# Altium PCB power_pcb.PcbDoc
Units mil, origin at the board's own origin, x right, y up, seen from the top; angles counter-clockwise.
Board outline 3107.48 x 2298.82 mil, 4 copper layers (Top Layer, Layer 1, Layer 2, Bottom Layer), stack 23.756 mil thick; 184 components, 90 nets, 482 pads, 12 vias.
Unrouted connection lines stored in the file: 242.
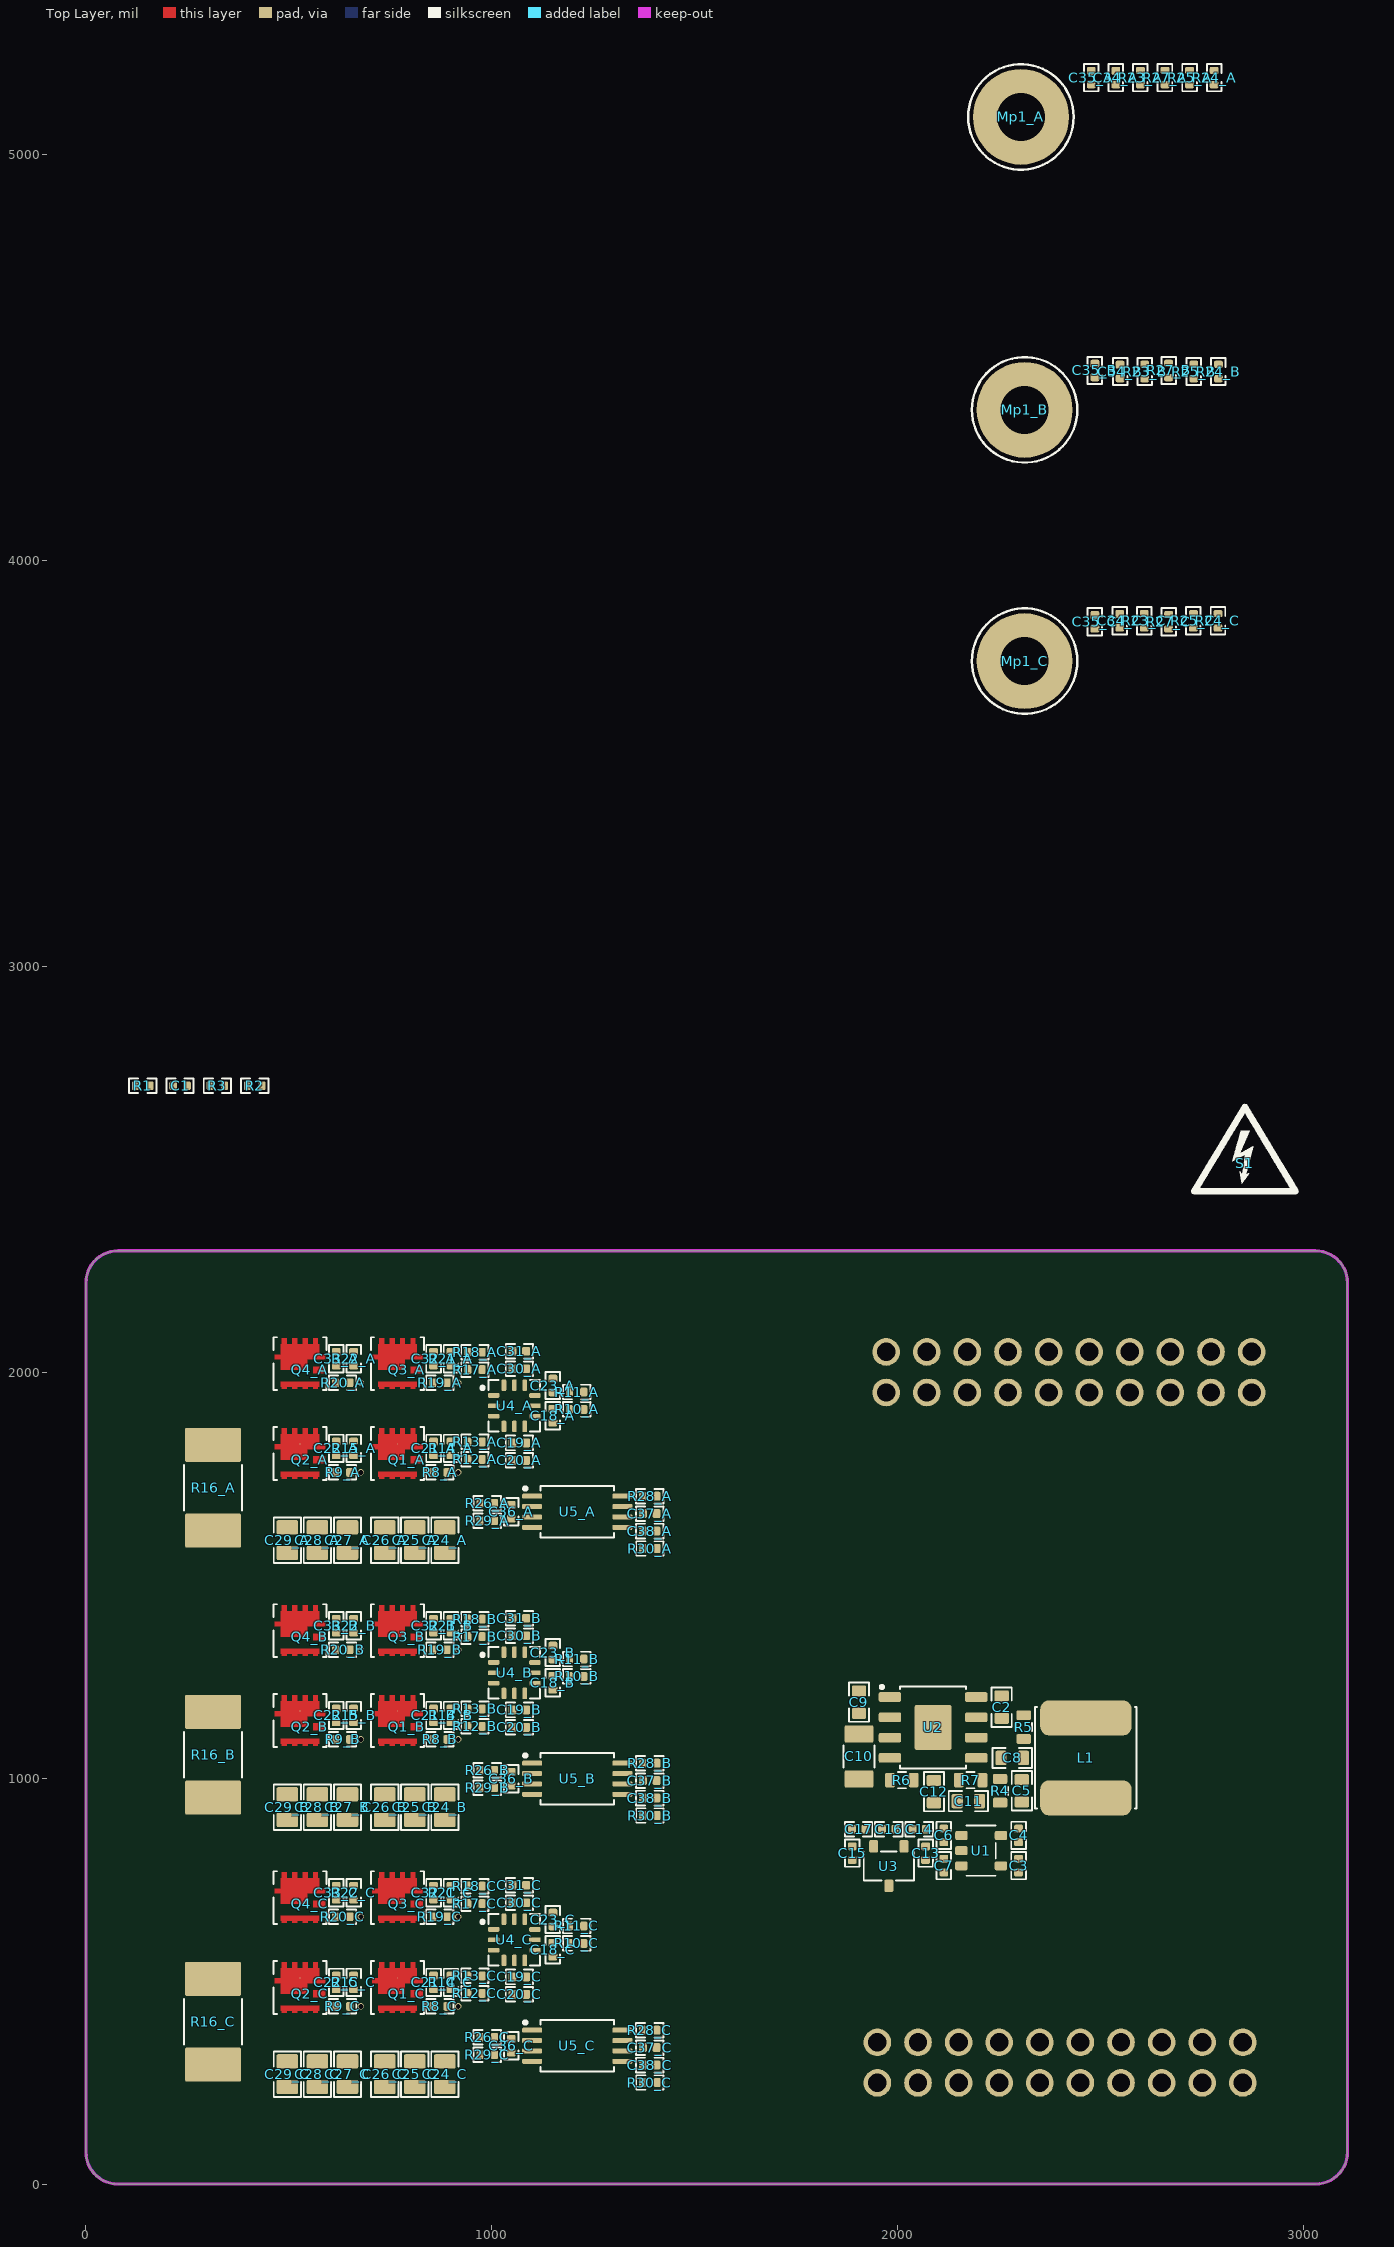
[diagram p0: Top Layer view]
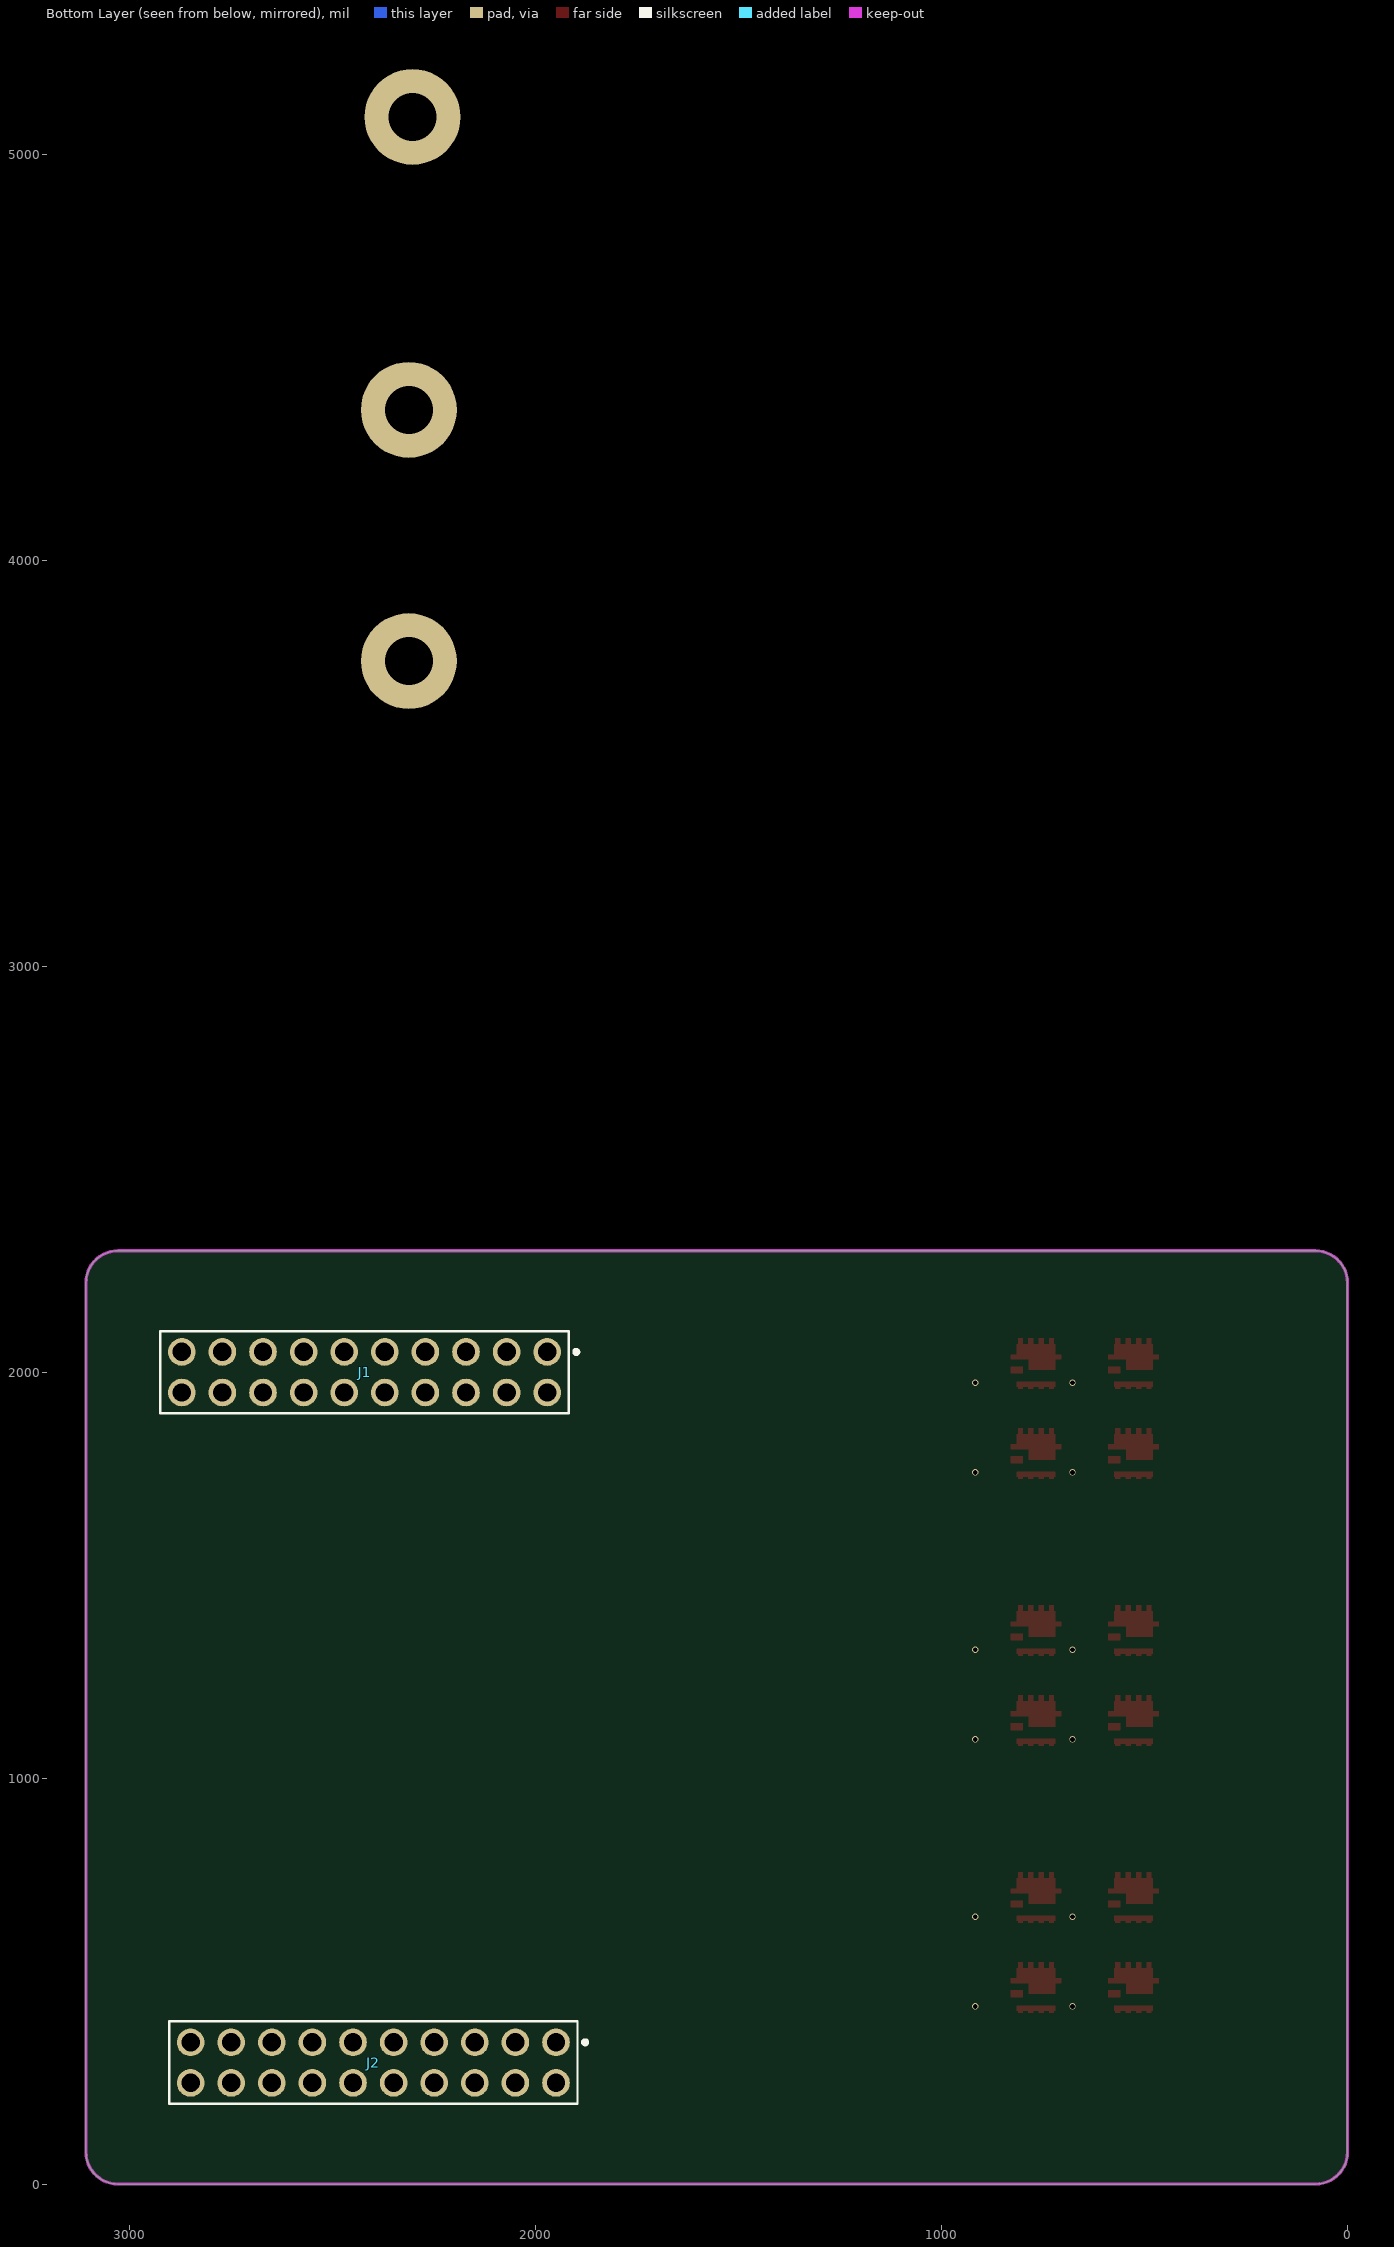
[diagram p1: Bottom Layer view, seen from below]

## Layer stack, top to bottom
Top Solder: solder mask 0.4, Solder Resist, Dk 3.5
Top Layer: signal copper 1.4
Dielectric 2: prepreg 2.8, PP-006, Dk 4.1
Layer 1: signal copper 1.378
Dielectric 1: dielectric 12.6, FR-4, Dk 4.8
Layer 2: signal copper 1.378
Dielectric 3: prepreg 2.8, PP-006, Dk 4.1
Bottom Layer: signal copper 1.4
Bottom Solder: solder mask 0.4, Solder Resist, Dk 3.5

## Board outline
0.25,78.99 0.25,2220.33 cw(c78.99,2220.33) 78.99,2299.07 3028.99,2299.07 cw(c3028.99,2220.33) 3107.73,2220.33 3107.73,78.99 cw(c3028.99,78.99) 3028.99,0.25 78.99,0.25 cw(c78.99,78.99)

## Design rules (kind name [scope] priority, off if disabled: settings)
Clearance [All] p1: gap=6 ignorepadtopadclearanceinfootprint=FALSE
DiffPairsRouting [All] p1: maxlimit=20 minlimit=6 mostfreqgap=10 toplayer_minwidth=6 toplayer_maxwidth=20 toplayer_prefwidth=10 midlayer1_minwidth=6 midlayer1_maxwidth=20 midlayer1_prefwidth=10 midlayer2_minwidth=6 midlayer2_maxwidth=20 midlayer2_prefwidth=10 bottomlayer_minwidth=6 bottomlayer_maxwidth=20 bottomlayer_prefwidth=10 maxuncoupledlength=500
HoleSize [All] p1: absolutevalues=TRUE maxlimit=248.03 minlimit=7.87 maxpercent=80.000 minpercent=20.000
PolygonConnect PolygonConnect_2 [All vs IsNamedPolygon('NONET_L-01_P-001') Or IsNamedPolygon('NONET_L-01_P-001') Or IsNamedPolygon('NONET_L-01_P-001') Or IsNamedPolygon('NONET_L-01_P-001') Or IsNamedPolygon('NONET_L-01_P-001') Or IsNamedPolygon('NONET_L-01_P-001') Or IsNamedPolygon('NONET_L-01_P-001') Or IsNamedPolygon('NONET_L-01_P-001') Or IsNamedPolygon('NONET_L-01_P-001')] p1: connectstyle=Direct reliefconductorwidth=10 reliefentries=4 polygonreliefangle="90 Angle" airgapwidth=10
PolygonConnect PolygonConnect_1 [All vs IsNamedPolygon('NONET_L-01_P-001') Or IsNamedPolygon('NONET_L-01_P-001') Or IsNamedPolygon('NONET_L-01_P-001') Or IsNamedPolygon('NONET_L-01_P-001') Or IsNamedPolygon('NONET_L-01_P-001') Or IsNamedPolygon('NONET_L-01_P-001')] p2: connectstyle=Direct reliefconductorwidth=10 reliefentries=4 polygonreliefangle="90 Angle" airgapwidth=10
PolygonConnect [All] p3: connectstyle=Direct reliefconductorwidth=10 reliefentries=4 polygonreliefangle="90 Angle" airgapwidth=10
RoomDefinition RoomDefinition_2 [InComponentClass('Room Definition5') vs False] p1: confinementstyle=ConfineIn formatcopy=TRUE lockcomponents=FALSE outline 1436.99,775.59 228.49,775.59 228.49,209.84 1436.99,209.84
RoomDefinition RoomDefinition_1 [InComponentClass('Room Definition4') vs False] p2: confinementstyle=ConfineIn formatcopy=TRUE lockcomponents=FALSE outline 1436.99,1433.26 228.49,1433.26 228.49,867.52 1436.99,867.52
RoomDefinition [InComponentClass('Room Definition1') vs False] p3: confinementstyle=ConfineIn formatcopy=TRUE lockcomponents=FALSE outline 1436.99,2090.94 228.49,2090.94 228.49,1525.19 1436.99,1525.19
RoutingVias [All] p1: holewidth=16 width=26 viastyle="Through Hole" minholewidth=12 minwidth=24 maxholewidth=24 maxwidth=40
SilkToSilkClearance [All] p1: silktosilkclearance=0
SolderMaskExpansion [All] p1: expansion=4 istentingtop=FALSE
SupplyNets "Schematic Supply Nets_4" [InNet('5V')] p1: voltage=0.000
SupplyNets "Schematic Supply Nets" [InNet('3V3')] p2: voltage=0.000
SupplyNets "Schematic Supply Nets_2" [InNet('GND')] p3: voltage=0.000
SupplyNets "Schematic Supply Nets_1" [InNet('POWER')] p4: voltage=0.000
UnRoutedNet [All] p1: checkbadconnections=TRUE
Width [All] p1: maxlimit=100 minlimit=5 preferedwidth=15
26 further rules are at their usual default settings.

## Classes and differential pairs
component class "Room Definition5": C18_C C19_C C20_C C21_C C22_C C23_C C24_C C25_C C26_C C27_C C28_C C29_C C30_C C31_C C32_C C33_C C36_C C37_C C38_C Q1_C Q2_C Q3_C Q4_C R8_C R9_C R10_C R11_C R12_C R13_C R14_C R15_C R16_C R17_C R18_C R19_C R20_C R21_C R22_C R26_C R28_C R29_C R30_C U4_C U5_C
component class "Room Definition4": C18_B C19_B C20_B C21_B C22_B C23_B C24_B C25_B C26_B C27_B C28_B C29_B C30_B C31_B C32_B C33_B C36_B C37_B C38_B Q1_B Q2_B Q3_B Q4_B R8_B R9_B R10_B R11_B R12_B R13_B R14_B R15_B R16_B R17_B R18_B R19_B R20_B R21_B R22_B R26_B R28_B R29_B R30_B U4_B U5_B
component class "Room Definition3": C18_C C19_C C20_C C21_C C22_C C23_C C24_C C25_C C26_C C27_C C28_C C29_C C30_C C31_C C32_C C33_C C34_C C36_C C37_C C38_C Q1_C Q2_C Q3_C Q4_C R8_C R9_C R10_C R11_C R12_C R13_C R14_C R15_C R16_C R17_C R18_C R19_C R20_C R21_C R22_C R23_C R24_C R25_C R26_C R28_C R29_C R30_C U4_C U5_C
component class "Room Definition2": C18_B C19_B C20_B C21_B C22_B C23_B C24_B C25_B C26_B C27_B C28_B C29_B C30_B C31_B C32_B C33_B C34_B C36_B C37_B C38_B Q1_B Q2_B Q3_B Q4_B R8_B R9_B R10_B R11_B R12_B R13_B R14_B R15_B R16_B R17_B R18_B R19_B R20_B R21_B R22_B R23_B R24_B R25_B R26_B R28_B R29_B R30_B U4_B U5_B
component class "Room Definition1": C18_A C19_A C20_A C21_A C22_A C23_A C24_A C25_A C26_A C27_A C28_A C29_A C30_A C31_A C32_A C33_A C36_A C37_A C38_A Q1_A Q2_A Q3_A Q4_A R8_A R9_A R10_A R11_A R12_A R13_A R14_A R15_A R16_A R17_A R18_A R19_A R20_A R21_A R22_A R26_A R28_A R29_A R30_A U4_A U5_A
component class Tree: C2 C3 C4 C5 C6 C7 C8 C9 C10 C11 C12 C13 C14 C15 C16 C17 L1 R4 R5 R6 R7 U1 U2 U3
channel class power_vsi: A B C
component class C: C18_C C19_C C20_C C21_C C22_C C23_C C24_C C25_C C26_C C27_C C28_C C29_C C30_C C31_C C32_C C33_C C34_C C35_C C36_C C37_C C38_C Mp1_C Q1_C Q2_C Q3_C Q4_C R8_C R9_C R10_C R11_C R12_C R13_C R14_C R15_C R16_C R17_C R18_C R19_C R20_C R21_C R22_C R23_C R24_C R25_C R26_C R27_C R28_C R29_C R30_C U4_C U5_C
component class B: C18_B C19_B C20_B C21_B C22_B C23_B C24_B C25_B C26_B C27_B C28_B C29_B C30_B C31_B C32_B C33_B C34_B C35_B C36_B C37_B C38_B Mp1_B Q1_B Q2_B Q3_B Q4_B R8_B R9_B R10_B R11_B R12_B R13_B R14_B R15_B R16_B R17_B R18_B R19_B R20_B R21_B R22_B R23_B R24_B R25_B R26_B R27_B R28_B R29_B R30_B U4_B U5_B
component class A: C18_A C19_A C20_A C21_A C22_A C23_A C24_A C25_A C26_A C27_A C28_A C29_A C30_A C31_A C32_A C33_A C34_A C35_A C36_A C37_A C38_A Mp1_A Q1_A Q2_A Q3_A Q4_A R8_A R9_A R10_A R11_A R12_A R13_A R14_A R15_A R16_A R17_A R18_A R19_A R20_A R21_A R22_A R23_A R24_A R25_A R26_A R27_A R28_A R29_A R30_A U4_A U5_A
component class power_full: C1 J1 J2 R1 R2 R3 S1
differential pair I_C: +I_C_P -I_C_N
differential pair I_B: +I_B_P -I_B_N
differential pair I_A: +I_A_P -I_A_N

## Components (designator, comment, footprint, x,y, rotation, side; value= is the part's Value field where it differs from the comment)
C1 "68nF" C0402 232.07,2705.72 r0 top
C2 "2.2nF" C0603 2256,1175 r90 top
C3 "1uF" C0402 2297.5,784.73 r90 top
C4 "100nF" C0402 2297.5,859 r270 top
C5 "1.2nF" C0603 2305.5,969.06 r90 top
C6 "100nF" C0402 2113.5,859 r270 top
C7 "1uF" C0402 2113.5,784.73 r90 top
C8 "56pF" C0603 2281.88,1050 r0 top
C9 "100nF" C0603 1904.5,1187.5 r270 top
C10 "2.2uF" C1206 1904.5,1053.5 r90 top
C11 "2.2uF" C0603 2174,943.5 r0 top
C12 "100nF" C0603 2089,967 r270 top
C13 "100nF" C0402 2068.5,815.5 r90 top
C14 "1uF" C0402 2053,874.5 r0 top
C15 "10uF" C0402 1887.75,815.5 r90 top
C16 "10uF" C0402 1978,874.5 r180 top
C17 "100nF" C0402 1903.5,874.5 r0 top
C18_A "100pF" C0402 1150.49,1892.8 r270 top (schematic designator C18)
C18_B "100pF" C0402 1150.49,1235.13 r270 top (schematic designator C18)
C18_C "100pF" C0402 1150.49,577.45 r270 top (schematic designator C18)
C19_A "100nF" C0402 1067.99,1825.8 r0 top (schematic designator C19)
C19_B "100nF" C0402 1067.99,1168.13 r0 top (schematic designator C19)
C19_C "100nF" C0402 1067.99,510.45 r0 top (schematic designator C19)
C20_A "100nF" C0402 1067.99,1782.8 r0 top (schematic designator C20)
C20_B "100nF" C0402 1067.99,1125.13 r0 top (schematic designator C20)
C20_C "100nF" C0402 1067.99,467.45 r0 top (schematic designator C20)
C21_A "100pF" C0402 856.49,1812.3 r270 top (schematic designator C21)
C21_B "100pF" C0402 856.49,1154.63 r270 top (schematic designator C21)
C21_C "100pF" C0402 856.49,496.95 r270 top (schematic designator C21)
C22_A "100pF" C0402 616.66,1812.3 r270 top (schematic designator C22)
C22_B "100pF" C0402 616.66,1154.63 r270 top (schematic designator C22)
C22_C "100pF" C0402 616.66,496.95 r270 top (schematic designator C22)
C23_A "100pF" C0402 1150.49,1967.3 r270 top (schematic designator C23)
C23_B "100pF" C0402 1150.49,1309.63 r270 top (schematic designator C23)
C23_C "100pF" C0402 1150.49,651.95 r270 top (schematic designator C23)
C24_A "100nF" C0805 884.49,1586.3 r90 top (schematic designator C24)
C24_B "100nF" C0805 884.49,928.63 r90 top (schematic designator C24)
C24_C "100nF" C0805 884.49,270.95 r90 top (schematic designator C24)
C25_A "1uF" C0805 810.49,1586.3 r90 top (schematic designator C25)
C25_B "1uF" C0805 810.49,928.63 r90 top (schematic designator C25)
C25_C "1uF" C0805 810.49,270.95 r90 top (schematic designator C25)
C26_A "2.2uF" C0805 736.49,1586.3 r90 top (schematic designator C26)
C26_B "2.2uF" C0805 736.49,928.63 r90 top (schematic designator C26)
C26_C "2.2uF" C0805 736.49,270.95 r90 top (schematic designator C26)
C27_A "100nF" C0805 644.49,1586.3 r90 top (schematic designator C27)
C27_B "100nF" C0805 644.49,928.63 r90 top (schematic designator C27)
C27_C "100nF" C0805 644.49,270.95 r90 top (schematic designator C27)
C28_A "1uF" C0805 570.49,1586.3 r90 top (schematic designator C28)
C28_B "1uF" C0805 570.49,928.63 r90 top (schematic designator C28)
C28_C "1uF" C0805 570.49,270.95 r90 top (schematic designator C28)
C29_A "2.2uF" C0805 496.49,1586.3 r90 top (schematic designator C29)
C29_B "2.2uF" C0805 496.49,928.63 r90 top (schematic designator C29)
C29_C "2.2uF" C0805 496.49,270.95 r90 top (schematic designator C29)
C30_A "4.7uF" C0402 1067.99,2008.8 r0 top (schematic designator C30)
C30_B "4.7uF" C0402 1067.99,1351.13 r0 top (schematic designator C30)
C30_C "4.7uF" C0402 1067.99,693.45 r0 top (schematic designator C30)
C31_A "100nF" C0402 1067.99,2051.8 r180 top (schematic designator C31)
C31_B "100nF" C0402 1067.99,1394.13 r180 top (schematic designator C31)
C31_C "100nF" C0402 1067.99,736.45 r180 top (schematic designator C31)
C32_A "100pF" C0402 856.49,2033.3 r270 top (schematic designator C32)
C32_B "100pF" C0402 856.49,1375.63 r270 top (schematic designator C32)
C32_C "100pF" C0402 856.49,717.95 r270 top (schematic designator C32)
C33_A "100pF" C0402 616.66,2033.3 r270 top (schematic designator C33)
C33_B "100pF" C0402 616.66,1375.63 r270 top (schematic designator C33)
C33_C "100pF" C0402 616.66,717.95 r270 top (schematic designator C33)
C34_A "68nF" C0402 2537.07,5188.98 r90 top (schematic designator C34)
C34_B "68nF" C0402 2547.57,4464.98 r90 top (schematic designator C34)
C34_C "68nF" C0402 2546.57,3850.9 r90 top (schematic designator C34)
C35_A "2.2nF" C0402 2476.52,5188.98 r90 top (schematic designator C35)
C35_B "2.2nF" C0402 2485.52,4467.48 r90 top (schematic designator C35)
C35_C "2.2nF" C0402 2485.52,3848.48 r90 top (schematic designator C35)
C36_A "1nF" C0402 1047.99,1656.3 r270 top (schematic designator C36)
C36_B "1nF" C0402 1047.99,998.63 r270 top (schematic designator C36)
C36_C "1nF" C0402 1047.99,340.95 r270 top (schematic designator C36)
C37_A "100nF" C0402 1388.99,1651.8 r180 top (schematic designator C37)
C37_B "100nF" C0402 1388.99,994.13 r180 top (schematic designator C37)
C37_C "100nF" C0402 1388.99,336.45 r180 top (schematic designator C37)
C38_A "100nF" C0402 1388.99,1608.8 r180 top (schematic designator C38)
C38_B "100nF" C0402 1388.99,951.13 r180 top (schematic designator C38)
C38_C "100nF" C0402 1388.99,293.45 r180 top (schematic designator C38)
J1 "SSQ-110-03-G-D" HDR-TH_P2.5_20P-Stacking 2421.5,2000 r0 bottom locked
J2 "SSQ-110-03-G-D" HDR-TH_P2.5_20P-Stacking 2399.83,299.5 r0 bottom locked
L1 "33uH" IND-SMD6028 2463.5,1050 r270 top
Mp1_A "UVW" M2.5-S 2303.37,5092.13 r90 top (schematic designator Mp1)
Mp1_B "UVW" M2.5-S 2312.37,4370.63 r90 top (schematic designator Mp1)
Mp1_C "UVW" M2.5-S 2312.37,3751.63 r90 top (schematic designator Mp1)
Q1_A "INN100EA035A" En-FCLGA9 767.49,1799.94 r180 top (schematic designator Q1)
Q1_B "INN100EA035A" En-FCLGA9 767.49,1142.27 r180 top (schematic designator Q1)
Q1_C "INN100EA035A" En-FCLGA9 767.49,484.59 r180 top (schematic designator Q1)
Q2_A "INN100EA035A" En-FCLGA9 527.49,1799.94 r180 top (schematic designator Q2)
Q2_B "INN100EA035A" En-FCLGA9 527.49,1142.27 r180 top (schematic designator Q2)
Q2_C "INN100EA035A" En-FCLGA9 527.49,484.59 r180 top (schematic designator Q2)
Q3_A "INN100EA035A" En-FCLGA9 767.49,2021.3 r180 top (schematic designator Q3)
Q3_B "INN100EA035A" En-FCLGA9 767.49,1363.63 r180 top (schematic designator Q3)
Q3_C "INN100EA035A" En-FCLGA9 767.49,705.95 r180 top (schematic designator Q3)
Q4_A "INN100EA035A" En-FCLGA9 527.49,2021.3 r180 top (schematic designator Q4)
Q4_B "INN100EA035A" En-FCLGA9 527.49,1363.63 r180 top (schematic designator Q4)
Q4_C "INN100EA035A" En-FCLGA9 527.49,705.95 r180 top (schematic designator Q4)
R1 "30K" R0402 140.02,2705.72 r0 top
R2 "27K" R0402 416.17,2705.72 r0 top
R3 "2.2K" R0402 324.12,2705.72 r0 top
R4 "316K" R0603 2252,969 r270 top
R5 "58.3K" R0603 2310.22,1126 r90 top
R6 "21K" R0603 2010,995.25 r180 top
R7 "101K" R0603 2179.48,995.25 r0 top
R8_A "1R" R0402 872.24,1753.3 r0 top (schematic designator R8)
R8_B "1R" R0402 872.24,1095.63 r0 top (schematic designator R8)
R8_C "1R" R0402 872.24,437.95 r0 top (schematic designator R8)
R9_A "1R" R0402 632.49,1753.3 r0 top (schematic designator R9)
R9_B "1R" R0402 632.49,1095.63 r0 top (schematic designator R9)
R9_C "1R" R0402 632.49,437.95 r0 top (schematic designator R9)
R10_A "22R" R0402 1208.99,1908.3 r180 top (schematic designator R10)
R10_B "22R" R0402 1208.99,1250.63 r180 top (schematic designator R10)
R10_C "22R" R0402 1208.99,592.95 r180 top (schematic designator R10)
R11_A "22R" R0402 1208.99,1951.3 r180 top (schematic designator R11)
R11_B "22R" R0402 1208.99,1293.63 r180 top (schematic designator R11)
R11_C "22R" R0402 1208.99,635.95 r180 top (schematic designator R11)
R12_A "4.7R" R0402 958.49,1785.3 r0 top (schematic designator R12)
R12_B "4.7R" R0402 958.49,1127.63 r0 top (schematic designator R12)
R12_C "4.7R" R0402 958.49,469.95 r0 top (schematic designator R12)
R13_A "1R" R0402 958.49,1828.3 r0 top (schematic designator R13)
R13_B "1R" R0402 958.49,1170.63 r0 top (schematic designator R13)
R13_C "1R" R0402 958.49,512.95 r0 top (schematic designator R13)
R14_A "10K" R0402 899.49,1812.3 r270 top (schematic designator R14)
R14_B "10K" R0402 899.49,1154.63 r270 top (schematic designator R14)
R14_C "10K" R0402 899.49,496.95 r270 top (schematic designator R14)
R15_A "10K" R0402 659.57,1812.3 r270 top (schematic designator R15)
R15_B "10K" R0402 659.57,1154.63 r270 top (schematic designator R15)
R15_C "10K" R0402 659.57,496.95 r270 top (schematic designator R15)
R16_A "1mR" R2512 313.49,1715.59 r90 top (schematic designator R16)
R16_B "1mR" R2512 313.49,1057.92 r90 top (schematic designator R16)
R16_C "1mR" R2512 313.49,400.25 r90 top (schematic designator R16)
R17_A "4.7R" R0402 958.49,2006.47 r0 top (schematic designator R17)
R17_B "4.7R" R0402 958.49,1348.8 r0 top (schematic designator R17)
R17_C "4.7R" R0402 958.49,691.13 r0 top (schematic designator R17)
R18_A "1R" R0402 958.49,2049.47 r0 top (schematic designator R18)
R18_B "1R" R0402 958.49,1391.8 r0 top (schematic designator R18)
R18_C "1R" R0402 958.49,734.13 r0 top (schematic designator R18)
R19_A "1R" R0402 872.24,1974.3 r0 top (schematic designator R19)
R19_B "1R" R0402 872.24,1316.63 r0 top (schematic designator R19)
R19_C "1R" R0402 872.24,658.95 r0 top (schematic designator R19)
R20_A "1R" R0402 632.49,1974.3 r0 top (schematic designator R20)
R20_B "1R" R0402 632.49,1316.63 r0 top (schematic designator R20)
R20_C "1R" R0402 632.49,658.95 r0 top (schematic designator R20)
R21_A "10K" R0402 899.49,2033.3 r270 top (schematic designator R21)
R21_B "10K" R0402 899.49,1375.63 r270 top (schematic designator R21)
R21_C "10K" R0402 899.49,717.95 r270 top (schematic designator R21)
R22_A "10K" R0402 659.57,2033.3 r270 top (schematic designator R22)
R22_B "10K" R0402 659.57,1375.63 r270 top (schematic designator R22)
R22_C "10K" R0402 659.57,717.95 r270 top (schematic designator R22)
R23_A "30K" R0402 2597.63,5188.98 r90 top (schematic designator R23)
R23_B "30K" R0402 2608.13,4464.98 r90 top (schematic designator R23)
R23_C "30K" R0402 2607.13,3850.9 r90 top (schematic designator R23)
R24_A "27K" R0402 2779.28,5188.98 r90 top (schematic designator R24)
R24_B "27K" R0402 2789.78,4464.98 r90 top (schematic designator R24)
R24_C "27K" R0402 2788.78,3850.9 r90 top (schematic designator R24)
R25_A "2.2K" R0402 2718.73,5188.98 r90 top (schematic designator R25)
R25_B "2.2K" R0402 2729.23,4464.98 r90 top (schematic designator R25)
R25_C "2.2K" R0402 2728.23,3850.9 r90 top (schematic designator R25)
R26_A "0R" R0402 988.99,1677.3 r0 top (schematic designator R26)
R26_B "0R" R0402 988.99,1019.63 r0 top (schematic designator R26)
R26_C "0R" R0402 988.99,361.95 r0 top (schematic designator R26)
R27_A "20R" R0402 2658.18,5188.98 r90 top (schematic designator R27)
R27_B "20R" R0402 2667.18,4467.48 r90 top (schematic designator R27)
R27_C "20R" R0402 2667.18,3848.48 r90 top (schematic designator R27)
R28_A "0R" R0402 1388.99,1694.8 r180 top (schematic designator R28)
R28_B "0R" R0402 1388.99,1037.13 r180 top (schematic designator R28)
R28_C "0R" R0402 1388.99,379.45 r180 top (schematic designator R28)
R29_A "0R" R0402 988.99,1634.3 r0 top (schematic designator R29)
R29_B "0R" R0402 988.99,976.63 r0 top (schematic designator R29)
R29_C "0R" R0402 988.99,318.95 r0 top (schematic designator R29)
R30_A "0R" R0402 1389.49,1565.8 r180 top (schematic designator R30)
R30_B "0R" R0402 1389.49,908.13 r180 top (schematic designator R30)
R30_C "0R" R0402 1389.49,250.45 r180 top (schematic designator R30)
S1 "SIGN_HV" SIGN_HV 2855,2515 r0 top
U1 "ME6211C33M5G" SOT23-5 2205.5,821.5 r270 top
U2 "LM5163DDAR" SOIC8-EP 2087,1125 r270 top
U3 "LKP4233ST" SOT23-3 1978,783.5 r180 top
U4_A "INS2003FQ" QFN12 1055.49,1917.3 r270 top (schematic designator U4)
U4_B "INS2003FQ" QFN12 1055.49,1259.63 r270 top (schematic designator U4)
U4_C "INS2003FQ" QFN12 1055.49,601.95 r270 top (schematic designator U4)
U5_A "INA240A1PWR" TSSOP8 1210.49,1656.3 r270 top (schematic designator U5)
U5_B "INA240A1PWR" TSSOP8 1210.49,998.63 r270 top (schematic designator U5)
U5_C "INA240A1PWR" TSSOP8 1210.49,340.95 r270 top (schematic designator U5)

## Footprints (in the part's own frame and the unit in brackets; to place one, negate y for a bottom-side part, rotate by r counter-clockwise, add the part's x,y. Pads: shape width x height; smd on the part's side, far side on the other; paste and mask are expansions set on the pad)
C0402 [mm]
  rrect40% 0.5x0.55 smd: 1(-0.425,0) 2(0.425,0)
  silkscreen extent -0.85,-0.46 0.85,0.46, body extent -0.5,-0.25 0.5,0.25, height 0.55
C0603 [mm]
  rrect29% 0.7x0.9 smd: 1(-0.7,0) 2(0.7,0)
  silkscreen extent -1.23,-0.63 1.23,0.63, body extent -0.8,-0.4 0.8,0.4, height 0.9
C0805 [mm]
  rrect22% 0.9x1.35 smd: 1(-0.8,0) 2(0.8,0)
  silkscreen extent -1.43,-0.85 1.43,0.86, body extent -1,-0.62 1,0.63, height 1.35
C1206 [mm]
  rrect19% 1.08x1.8 smd: 1(-1.408,0) 2(1.408,0)
  silkscreen extent -0.69,-0.96 0.69,0.96, body extent -1.6,-0.8 1.6,0.8, height 1.8
En-FCLGA9 [mil]
  round 1 smd: D(0,53.64) G(-47.15,15.75) S(0,-23.13)
  round 1 on Top Paste: S(0,-23.13)
  Top Layer region: -62.01,24.02 -32.28,24.02 -32.28,7.48 -62.01,7.48
  Top Layer region: -44.29,62.01 -44.29,57.09 -47.44,57.09 -47.44,45.28 47.44,45.28 47.44,57.09 44.29,57.09 44.29,62.01 32.28,62.01 32.28,57.09 18.7,57.09 18.7,62.01 6.89,62.01 6.89,57.09 -6.89,57.09 -6.89,62.01 -18.7,62.01 -18.7,57.09 -32.28,57.09 -32.28,62.01
  Top Layer region: -18.14,15.75 -18.14,-10.43 -62.01,-10.43 -62.01,-22.24 -47.44,-22.24 -47.44,-47.24 -44.29,-47.24 -44.29,-62.01 -32.48,-62.01 -32.48,-47.24 -18.7,-47.24 -18.7,-62.01 -6.89,-62.01 -6.89,-47.24 6.89,-47.24 6.89,-62.01 18.7,-62.01 18.7,-47.24 32.48,-47.24 32.48,-62.01 44.29,-62.01 44.29,-47.24 47.44,-47.24 47.44,-22.24 62.01,-22.24 62.01,-10.43 47.44,-10.43 47.44,15.75
  silkscreen extent -65,-65 65,65, body extent -66,-65 64,65, height 38
HDR-TH_P2.5_20P-Stacking [mm] "Header, Vertical Non-Shrouded, 2.54 mm pitch; 0.69 mm lead width, 20 pin, 2 rows, 25.40 mm L X 5.00 mm W X 8.55 mm H body"
  round 1.73 hole 1.15 paste-2539.97: 1(-11.43,-1.27) 2(-11.43,1.27) 3(-8.89,-1.27) 4(-8.89,1.27) 5(-6.35,-1.27) 6(-6.35,1.27) 7(-3.81,-1.27) 8(-3.81,1.27) 9(-1.27,-1.27) 10(-1.27,1.27) 11(1.27,-1.27) 12(1.27,1.27) 13(3.81,-1.27) 14(3.81,1.27) 15(6.35,-1.27) 16(6.35,1.27) 17(8.89,-1.27) 18(8.89,1.27) 19(11.43,-1.27) 20(11.43,1.27)
  silkscreen extent -13.37,-2.57 12.78,2.58, body extent -12.95,-2.5 12.95,2.5, height 8.5
IND-SMD6028 [mm]
  rrect50% 2.2x5.72 smd: 1(-2.5,0) 2(2.5,0)
  silkscreen extent -3.18,-3.18 3.18,3.18, body extent -3.01,-3 3.01,3, height 2.81
M2.5-S [mm] "Mounting Hole, Plated; 6.00 mm Pad, 3.00 mm Hole"
  round 6 hole 3 paste-2539.97: 1(0,0)
  silkscreen extent -3.3,-3.3 3.3,3.3
QFN12 [mm] "Quad Flat No-Lead (QFN), 0.65 mm pitch; 12 pin, square, 3 pin X 3 pin, 3.00 mm L X 3.00 mm W X 0.95 mm H body"
  rrect53% 0.3x0.72 smd: 1(-0.65,-1.29) 2(0,-1.29) 3(0.65,-1.29) 7(0.65,1.29) 8(0,1.29) 9(-0.65,1.29)
  rrect53% 0.72x0.3 smd: 4(1.29,-0.65) 5(1.29,0) 6(1.29,0.65) 10(-1.29,0.65) 11(-1.29,0) 12(-1.29,-0.65)
  silkscreen extent -1.61,-2.09 1.61,1.61, body extent -1.55,-1.55 1.55,1.55, height 0.95
R0402 [mm]
  rrect44% 0.45x0.55 smd: 1(-0.45,0) 2(0.45,0)
  silkscreen extent -0.85,-0.46 0.85,0.46, body extent -0.5,-0.25 0.5,0.25, height 0.4
R0603 [mm]
  rrect32% 0.62x0.9 smd: 1(-0.741,0) 2(0.741,0)
  silkscreen extent -0.25,-0.51 0.25,0.51, body extent -0.8,-0.4 0.8,0.4, height 0.55
R2512 [mm]
  rrect9% 2.13x3.5 smd: 1(-2.683,0) 2(2.683,0)
  silkscreen extent -1.44,-1.81 1.44,1.81, body extent -3.2,-1.6 3.2,1.6, height 1.2
SIGN_HV [mil]
  silkscreen extent -132,-76 132,146
SOIC8-EP [mm] "Small Outline Pkg (SOP) with tab, 1.27 mm pitch; 9 pin, 4.90 mm L X 3.90 mm W X 1.70 mm H body"
  rrect33% 0.6x1.4 smd: 1(-1.905,-2.7) 2(-0.635,-2.7) 3(0.635,-2.7) 4(1.905,-2.7) 5(1.905,2.7) 6(0.635,2.7) 7(-0.635,2.7) 8(-1.905,2.7)
  rrect9% 2.8x2.3 smd paste-2.8: 9(0,0)
  silkscreen extent -2.63,-3.3 2.56,2.06, body extent -2.45,-3 2.45,3, height 1.7
SOT23-3 [mm] "Small Outline Transistor (SOT23), 0.95 mm pitch; 3 pin, 2.92 mm L X 1.60 mm W X 1.25 mm H body"
  rrect36% 0.56x0.78 smd: 1(-0.95,-1.235) 2(0.95,-1.235) 3(0,1.235)
  silkscreen extent -1.57,-0.91 1.57,0.91, body extent -1.46,-1.4 1.46,1.4, height 1.25
SOT23-5 [mm] "Small Outline Transistor (SOT23), 0.95 mm pitch; 5 pin, 2.92 mm L X 1.60 mm W X 1.25 mm H body"
  rrect36% 0.56x0.78 smd: 1(-0.95,-1.235) 2(0,-1.235) 3(0.95,-1.235) 4(0.95,1.235) 5(-0.95,1.235)
  silkscreen extent -1.57,-0.91 1.57,0.91, body extent -1.46,-1.4 1.46,1.4, height 1.25
TSSOP8 [mm] "Small Outline Pkg (SOP), 0.65 mm pitch; 8 pin, 3.00 mm L X 4.40 mm W X 1.20 mm H body"
  rrect50% 0.32x1.25 smd: 1(-0.975,-2.825) 2(-0.325,-2.825) 3(0.325,-2.825) 4(0.975,-2.825) 5(0.975,2.825) 6(0.325,2.825) 7(-0.325,2.825) 8(-0.975,2.825)
  silkscreen extent -1.61,-3.35 1.61,2.31, body extent -1.5,-3.2 1.5,3.2, height 1.2

## Part data
C1 C21_A C21_B C21_C C22_A C22_B C22_C C32_A C32_B C32_C C33_A C33_B C33_C C34_A C34_B C34_C C35_A C35_B C35_C C36_A C36_B C36_C: library part Capacitor, "16V, 5%"
C2 C5 C8: library part Capacitor, "50V 5%"
C3 C4 C6 C7 C11 C12 C13 C14 C17: library part Capacitor, "16V 10%"
C9 C10 C24_A C24_B C24_C C25_A C25_B C25_C C26_A C26_B C26_C C27_A C27_B C27_C C28_A C28_B C28_C C29_A C29_B C29_C: library part Capacitor, "100V 10%"
C15 C16: library part Capacitor, "10V 10%"
C18_A C18_B C18_C C23_A C23_B C23_C C30_A C30_B C30_C C31_A C31_B C31_C C37_A C37_B C37_C C38_A C38_B C38_C: library part Capacitor, "16V, 10%"
C19_A C19_B C19_C C20_A C20_B C20_C: library part Capacitor, "25V, 5%"
J1 J2: library part TH-20P
L1: library part Inductor
Mp1_A Mp1_B Mp1_C: library part Mpad
Q1_A Q1_B Q1_C Q2_A Q2_B Q2_C Q3_A Q3_B Q3_C Q4_A Q4_B Q4_C: library part GaN
R1 R2 R3 R4 R6 R7 R16_A R16_B R16_C R23_A R23_B R23_C R24_A R24_B R24_C R25_A R25_B R25_C R30_A R30_B R30_C: library part Resistance, "1%"
R5 R8_A R8_B R8_C R9_A R9_B R9_C R12_A R12_B R12_C R13_A R13_B R13_C R14_A R14_B R14_C R15_A R15_B R15_C R17_A R17_B R17_C R18_A R18_B R18_C R19_A R19_B R19_C R20_A R20_B R20_C R21_A R21_B R21_C R22_A R22_B R22_C R27_A R27_B R27_C: library part Resistance, "5%"
R10_A R10_B R10_C R11_A R11_B R11_C: library part Resistance, "10%"
R26_A R26_B R26_C R28_A R28_B R28_C R29_A R29_B R29_C: library part Resistance
U2: library part LM516xDDAR
U3: library part LKP42xxST
U4_A U4_B U4_C: library part INS200xFQ
U5_A U5_B U5_C: library part INA240AxPWR

## Via types
v1: diameter 15.75, hole 11.81, Top Layer to Bottom Layer, 12 vias

## Nets (pads, with @x,y where several pads share a name; then routed paths per layer and width w, separated by ;. In a path a pad name is that pad's centre, name@x,y a point inside that pad or via, vN(x,y) a via of type N, cw(c..) or ccw(c..) an arc to the next point about the centre after c; other vN are vias at no path point)
3V3: C3.2 C4.2 R30_A.1 R30_B.1 R30_C.1 U1.5
5V: C5.1 C6.2 C7.2 C11.2 C12.2 C13.2 C14.2 C30_A.2 C30_B.2 C30_C.2 C31_A.1 C31_B.1 C31_C.1 L1.2 R4.2 U1.1 U1.3 U3.1 U4_A.10 U4_B.10 U4_C.10
GH_A: R8_A.2 R9_A.2 R12_A.1 R13_A.1
  other v1: 677.49,1753.3 917.24,1753.3
GH_B: R8_B.2 R9_B.2 R12_B.1 R13_B.1
  other v1: 677.49,1095.63 917.24,1095.63
GH_C: R8_C.2 R9_C.2 R12_C.1 R13_C.1
  other v1: 677.49,437.95 917.24,437.95
GL_A: R17_A.1 R18_A.1 R19_A.2 R20_A.2
  other v1: 677.49,1974.3 917.24,1974.3
GL_B: R17_B.1 R18_B.1 R19_B.2 R20_B.2
  other v1: 677.49,1316.63 917.24,1316.63
GL_C: R17_C.1 R18_C.1 R19_C.2 R20_C.2
  other v1: 677.49,658.95 917.24,658.95
GND: C1.2 C3.1 C4.1 C6.1 C7.1 C9.1 C10.1 C11.1 C12.1 C13.1 C14.1 C15.1 C16.1 C17.1 C18_A.2 C18_B.2 C18_C.2 C23_A.1 C23_B.1 C23_C.1 C24_A.1 C24_B.1 C24_C.1 C25_A.1 C25_B.1 C25_C.1 C26_A.1 C26_B.1 C26_C.1 C27_A.1 C27_B.1 C27_C.1 C28_A.1 C28_B.1 C28_C.1 C29_A.1 C29_B.1 C29_C.1 C30_A.1 C30_B.1 C30_C.1 C31_A.2 C31_B.2 C31_C.2 C32_A.1 C32_B.1 C32_C.1 C33_A.1 C33_B.1 C33_C.1 C34_A.2 C34_B.2 C34_C.2 C35_A.2 C35_B.2 C35_C.2 C37_A.1 C37_B.1 C37_C.1 C38_A.1 C38_B.1 C38_C.1 Q3_A.S@767.49,2044.43 Q3_B.S@767.49,1386.76 Q3_C.S@767.49,729.08 Q4_A.S@527.49,2044.43 Q4_B.S@527.49,1386.76 Q4_C.S@527.49,729.08 R3.2 R6.1 R7.1 R21_A.1 R21_B.1 R21_C.1 R22_A.1 R22_B.1 R22_C.1 R25_A.2 R25_B.2 R25_C.2 U1.2 U2.1 U2.9 U3.3 U4_A.7 U4_A.11 U4_B.7 U4_B.11 U4_C.7 U4_C.11 U5_A.1 U5_A.4 U5_A.7 U5_B.1 U5_B.4 U5_B.7 U5_C.1 U5_C.4 U5_C.7
HA: R10_A.1
HB: R10_B.1
HC: R10_C.1
I_A_N: Mp1_A.1 R16_A.1 R23_A.1 R29_A.1
I_A_P: C21_A.1 C22_A.1 Q1_A.S@767.49,1823.07 Q2_A.S@527.49,1823.07 Q3_A.D Q4_A.D R14_A.1 R15_A.1 R16_A.2 R26_A.1 U4_A.2
I_B_N: Mp1_B.1 R16_B.1 R23_B.1 R29_B.1
I_B_P: C21_B.1 C22_B.1 Q1_B.S@767.49,1165.4 Q2_B.S@527.49,1165.4 Q3_B.D Q4_B.D R14_B.1 R15_B.1 R16_B.2 R26_B.1 U4_B.2
I_C_N: Mp1_C.1 R16_C.1 R23_C.1 R29_C.1
I_C_P: C21_C.1 C22_C.1 Q1_C.S@767.49,507.72 Q2_C.S@527.49,507.72 Q3_C.D Q4_C.D R14_C.1 R15_C.1 R16_C.2 R26_C.1 U4_C.2
IA: C35_A.1 R27_A.2
IB: C35_B.1 R27_B.2
IC: C35_C.1 R27_C.2
LA: R11_A.1
LB: R11_B.1
LC: R11_C.1
NetC1_1: C1.1 R2.2 R3.1
NetC2_1: C2.1 L1.1 R5.2 U2.7
NetC2_2: C2.2 U2.8
NetC5_2: C5.2 C8.2 R5.1
NetC8_1: C8.1 R4.1 R7.2 U2.5
NetC15_2: C15.2 C16.2 C17.2 R28_A.1 R28_B.1 R28_C.1 U3.2
NetC18_A_1: C18_A.1 R10_A.2 U4_A.8
NetC18_B_1: C18_B.1 R10_B.2 U4_B.8
NetC18_C_1: C18_C.1 R10_C.2 U4_C.8
NetC19_A_1: C19_A.1 C20_A.1 U4_A.5
NetC19_A_2: C19_A.2 C20_A.2 U4_A.6
NetC19_B_1: C19_B.1 C20_B.1 U4_B.5
NetC19_B_2: C19_B.2 C20_B.2 U4_B.6
NetC19_C_1: C19_C.1 C20_C.1 U4_C.5
NetC19_C_2: C19_C.2 C20_C.2 U4_C.6
NetC21_A_2: C21_A.2 Q1_A.G R8_A.1 R14_A.2
NetC21_B_2: C21_B.2 Q1_B.G R8_B.1 R14_B.2
NetC21_C_2: C21_C.2 Q1_C.G R8_C.1 R14_C.2
NetC22_A_2: C22_A.2 Q2_A.G R9_A.1 R15_A.2
NetC22_B_2: C22_B.2 Q2_B.G R9_B.1 R15_B.2
NetC22_C_2: C22_C.2 Q2_C.G R9_C.1 R15_C.2
NetC23_A_2: C23_A.2 R11_A.2 U4_A.9
NetC23_B_2: C23_B.2 R11_B.2 U4_B.9
NetC23_C_2: C23_C.2 R11_C.2 U4_C.9
NetC32_A_2: C32_A.2 Q3_A.G R19_A.1 R21_A.2
NetC32_B_2: C32_B.2 Q3_B.G R19_B.1 R21_B.2
NetC32_C_2: C32_C.2 Q3_C.G R19_C.1 R21_C.2
NetC33_A_2: C33_A.2 Q4_A.G R20_A.1 R22_A.2
NetC33_B_2: C33_B.2 Q4_B.G R20_B.1 R22_B.2
NetC33_C_2: C33_C.2 Q4_C.G R20_C.1 R22_C.2
NetC36_A_1: C36_A.1 R26_A.2 U5_A.2
NetC36_A_2: C36_A.2 R29_A.2 U5_A.3
NetC36_B_1: C36_B.1 R26_B.2 U5_B.2
NetC36_B_2: C36_B.2 R29_B.2 U5_B.3
NetC36_C_1: C36_C.1 R26_C.2 U5_C.2
NetC36_C_2: C36_C.2 R29_C.2 U5_C.3
NetC37_A_2: C37_A.2 R28_A.2 U5_A.6
NetC37_B_2: C37_B.2 R28_B.2 U5_B.6
NetC37_C_2: C37_C.2 R28_C.2 U5_C.6
NetC38_A_2: C38_A.2 R30_A.2 U5_A.5
NetC38_B_2: C38_B.2 R30_B.2 U5_B.5
NetC38_C_2: C38_C.2 R30_C.2 U5_C.5
NetR1_2: R1.2 R2.1
NetR6_2: R6.2 U2.4
NetR12_A_2: R12_A.2 U4_A.4
NetR12_B_2: R12_B.2 U4_B.4
NetR12_C_2: R12_C.2 U4_C.4
NetR13_A_2: R13_A.2 U4_A.3
NetR13_B_2: R13_B.2 U4_B.3
NetR13_C_2: R13_C.2 U4_C.3
NetR17_A_2: R17_A.2 U4_A.1
NetR17_B_2: R17_B.2 U4_B.1
NetR17_C_2: R17_C.2 U4_C.1
NetR18_A_2: R18_A.2 U4_A.12
NetR18_B_2: R18_B.2 U4_B.12
NetR18_C_2: R18_C.2 U4_C.12
NetR23_A_2: R23_A.2 R24_A.1
NetR23_B_2: R23_B.2 R24_B.1
NetR23_C_2: R23_C.2 R24_C.1
NetR27_A_1: R27_A.1 U5_A.8
NetR27_B_1: R27_B.1 U5_B.8
NetR27_C_1: R27_C.1 U5_C.8
POWER: C9.2 C10.2 C24_A.2 C24_B.2 C24_C.2 C25_A.2 C25_B.2 C25_C.2 C26_A.2 C26_B.2 C26_C.2 C27_A.2 C27_B.2 C27_C.2 C28_A.2 C28_B.2 C28_C.2 C29_A.2 C29_B.2 C29_C.2 Q1_A.D Q1_B.D Q1_C.D Q2_A.D Q2_B.D Q2_C.D R1.1 U2.2 U2.3
UA: C34_A.1 R24_A.2 R25_A.1
UB: C34_B.1 R24_B.2 R25_B.1
UC: C34_C.1 R24_C.2 R25_C.1
pads on no net: J1.1 J1.2 J1.3 J1.4 J1.5 J1.6 J1.7 J1.8 J1.9 J1.10 J1.11 J1.12 J1.13 J1.14 J1.15 J1.16 J1.17 J1.18 J1.19 J1.20 J2.1 J2.2 J2.3 J2.4 J2.5 J2.6 J2.7 J2.8 J2.9 J2.10 J2.11 J2.12 J2.13 J2.14 J2.15 J2.16 J2.17 J2.18 J2.19 J2.20 Q1_A.S@767.49,1823.07 Q1_B.S@767.49,1165.4 Q1_C.S@767.49,507.72 Q2_A.S@527.49,1823.07 Q2_B.S@527.49,1165.4 Q2_C.S@527.49,507.72 Q3_A.S@767.49,2044.43 Q3_B.S@767.49,1386.76 Q3_C.S@767.49,729.08 Q4_A.S@527.49,2044.43 Q4_B.S@527.49,1386.76 Q4_C.S@527.49,729.08 U1.4 U2.6

## Keep-outs
Keep-Out Layer:
  the board outline again, w7.87

## Silkscreen, mask and mechanical layers (free items; w line width, h text height)
Mechanical 1:
  the board outline again, w0.5